# Altium PCB l1.pcbdoc
Units mm, origin at the board's own origin, x right, y up, seen from the top; angles counter-clockwise.
Board outline 142.49 x 113.03 mm, 2 copper layers (Top Layer, Bottom Layer); 17 components, 25 nets, 68 pads, 9 vias.
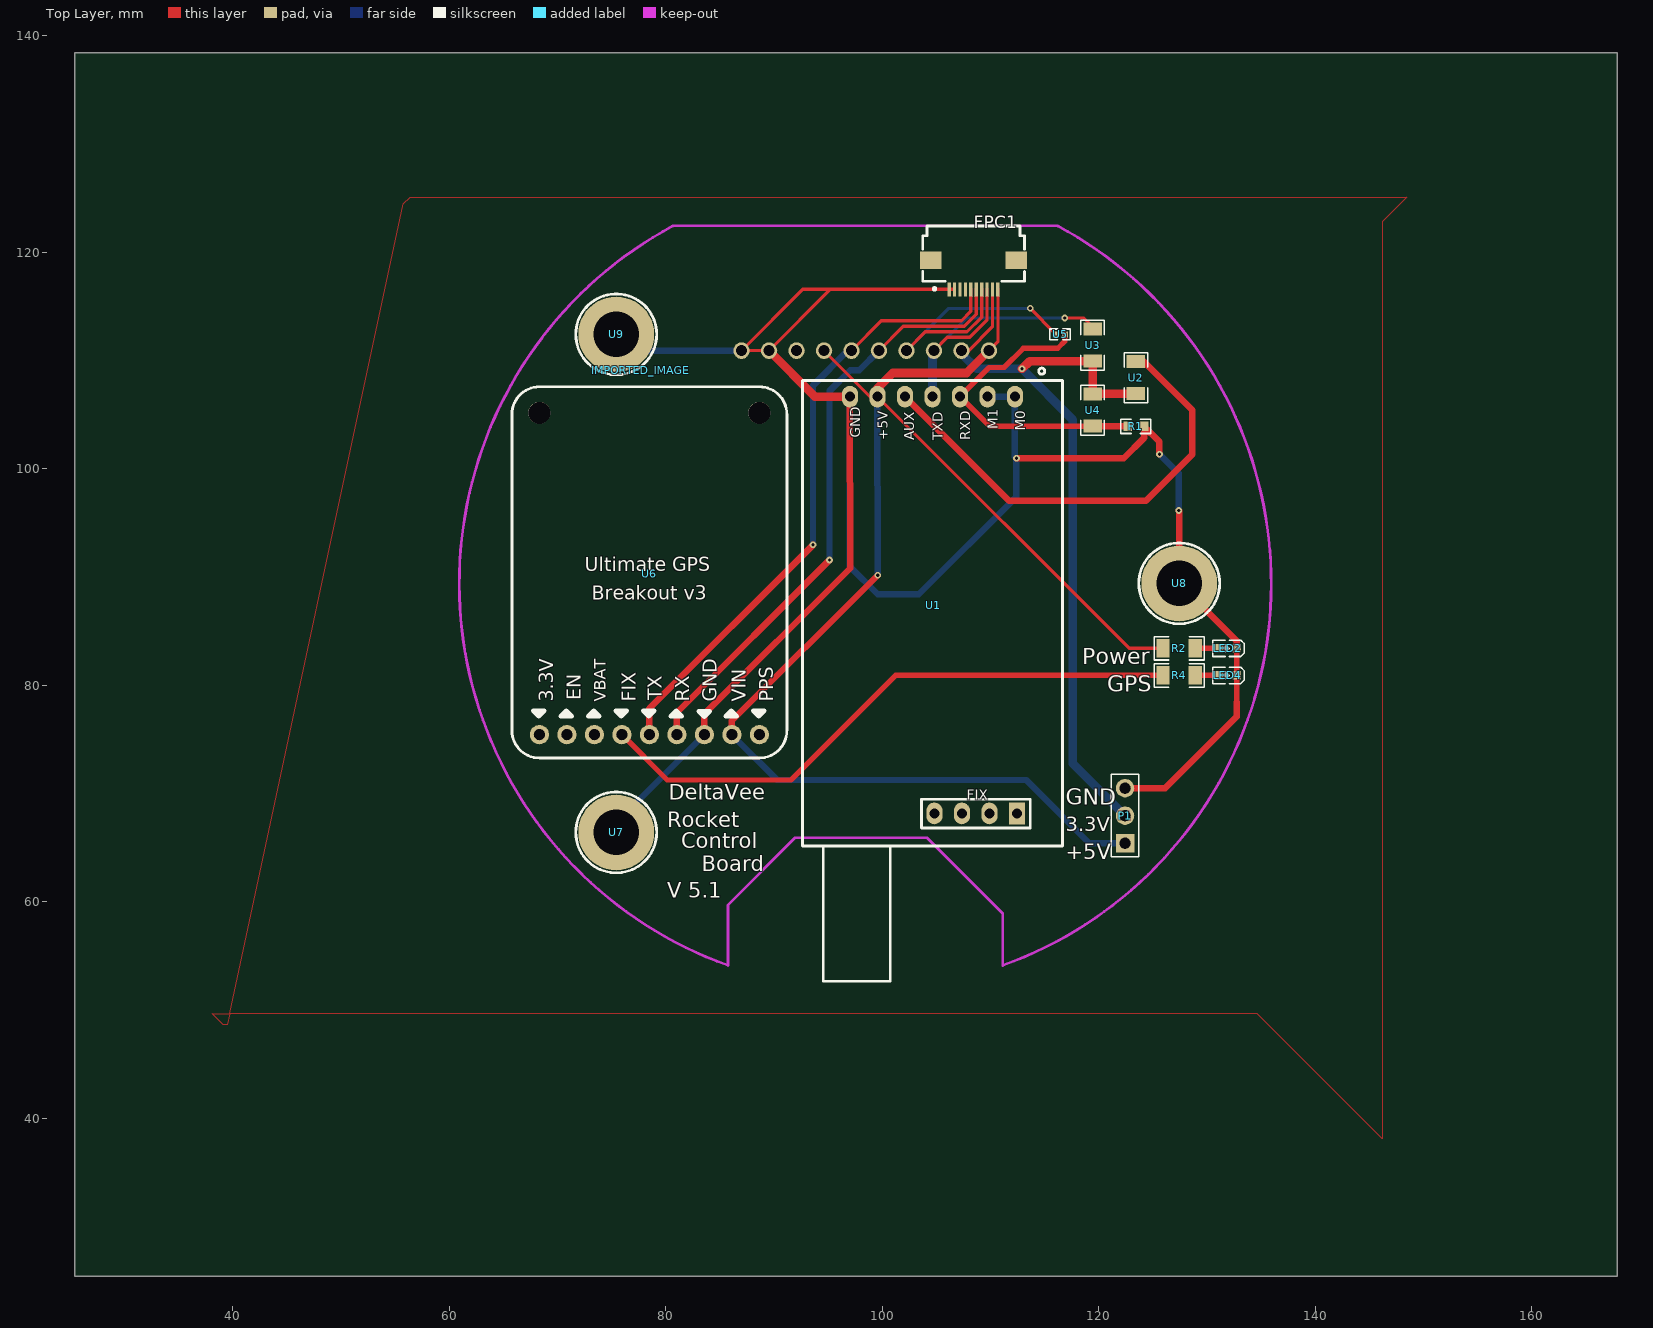
[diagram p0: Top Layer view]
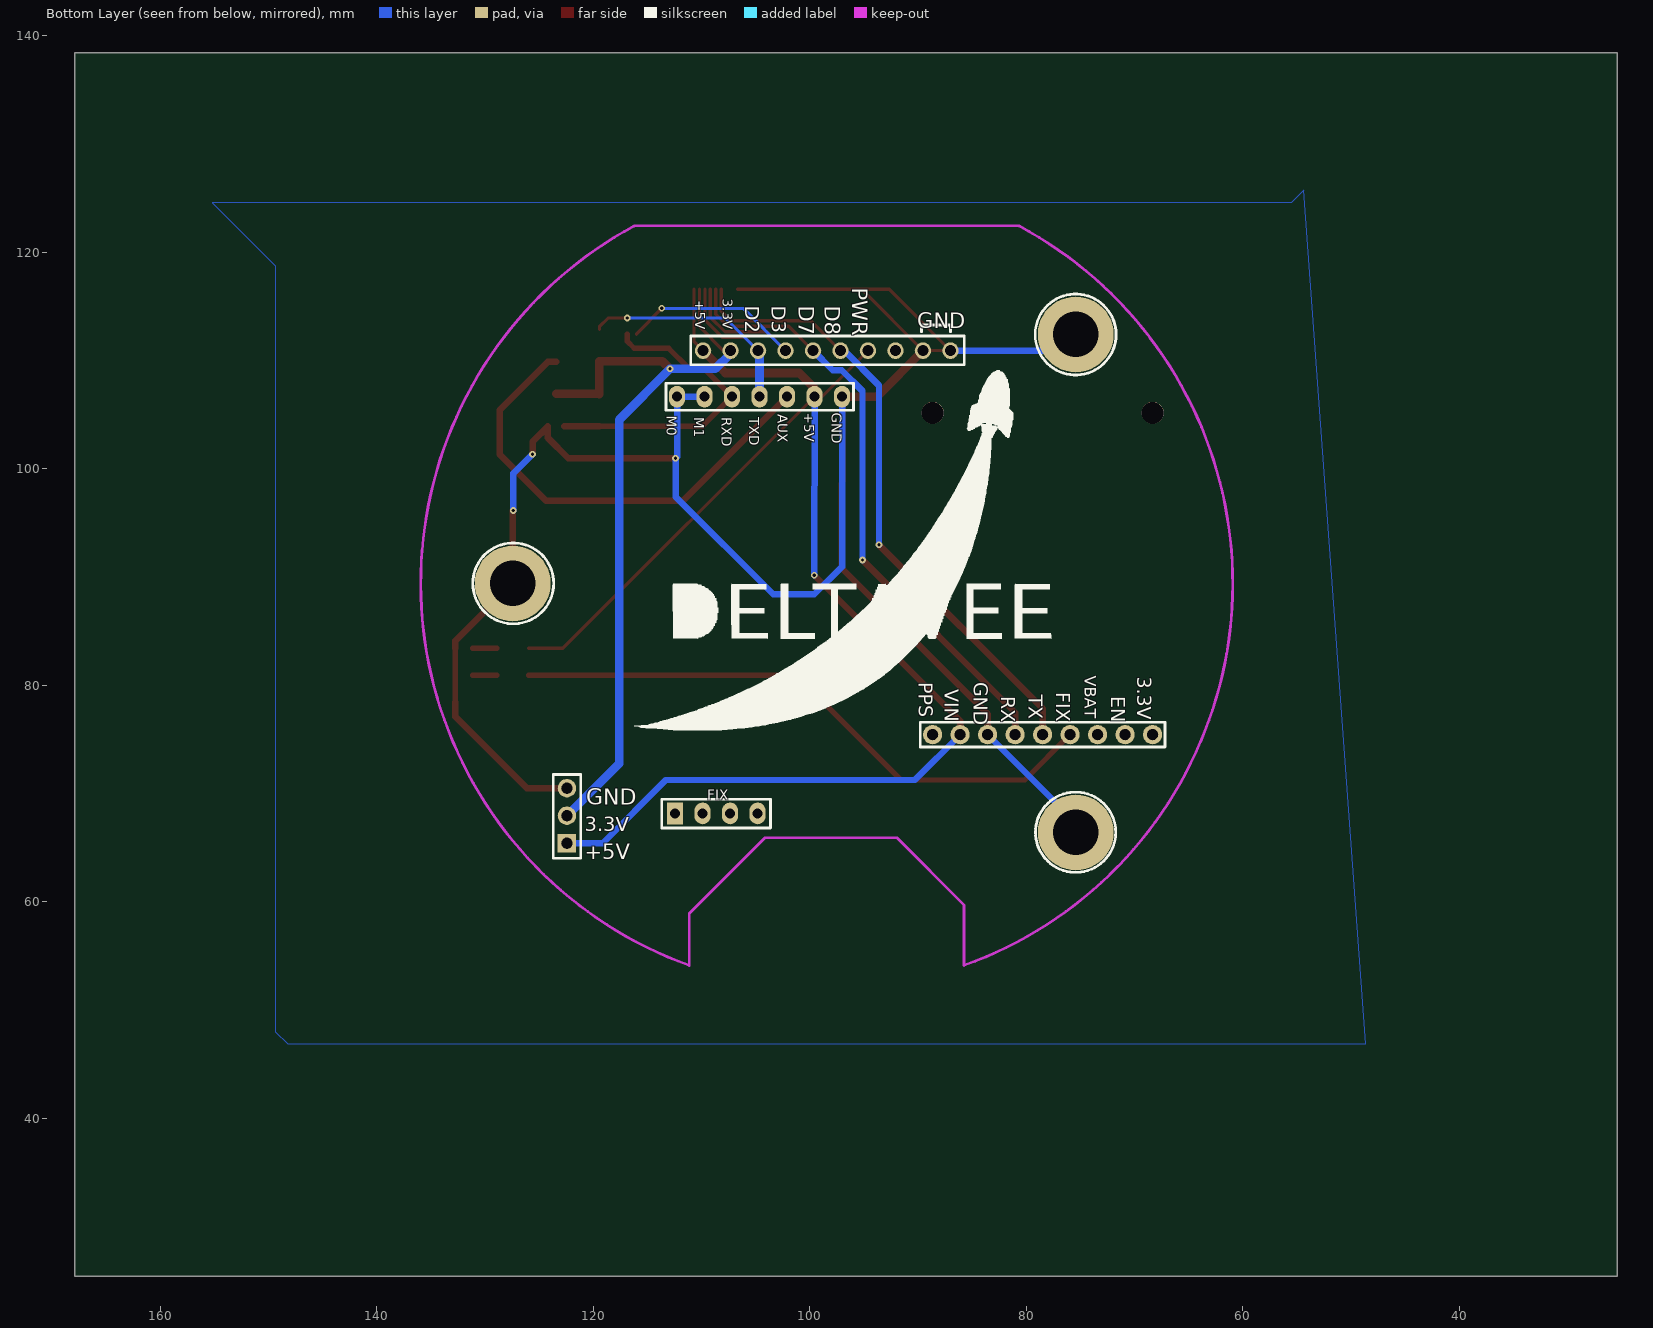
[diagram p1: Bottom Layer view, seen from below]

## Layer stack, top to bottom
Top Layer: signal copper (thickness not stored)
Dielectric: dielectric 0.32, FR-4, Dk 4.8
Bottom Layer: signal copper (thickness not stored)

## Board outline
167.894,25.4 25.4,25.4 25.4,138.43 167.894,138.43

## Components (designator, comment, footprint, x,y, rotation, side; value= is the part's Value field where it differs from the comment)
FPC1 "AFC01-S10FCA-00" FPC-SMD_P0.5-10P_FGS-XJ-H2.0 108.425,117.908 r0 top
IMPORTED_IMAGE "IMPORTED_IMAGE" IMPORTED_IMAGE 77.699,109.077 r0 top
LED2 "SMLD12E3N1WT86" LED0603-RD_GREEN 131.925,83.408 r180 top
LED4 "SMLD12E3N1WT86" LED0603-RD_GREEN 131.925,80.908 r180 top
P1 "Pin Header S-01" CONNECTOR_PINHEADER_2.54MM:PINHEADER_1X3 122.425,65.408 r180 top
R1 "2kΩ" R0603 123.425,103.908 r0 top
R2 "300Ω" R1206 127.425,83.408 r0 top
R4 "300Ω" R1206 127.425,80.908 r0 top
U1 "E22-400T30D" COMM-TH_E22-400T30D 104.725,87.408 r0 top
U2 "4.7kΩ" R1206 123.425,108.408 r270 top
U3 "4.7kΩ" R1206 119.425,111.408 r270 top
U4 "4.7kΩ" R1206 119.425,105.408 r90 top
U5 "1kΩ" R0402 116.425,112.408 r180 top
U6 "GPS_CUSTOM COPY" "ADAFRUIT GPS" 65.913,73.406 r0 top
U7 "MH_M4_S" MH_M4_PCB 75.425,66.408 r0 top
U8 "MH_M4_S" MH_M4_PCB 127.425,89.408 r0 top
U9 "MH_M4_S" MH_M4_PCB 75.425,112.408 r0 top

## Footprints (in the part's own frame and the unit in brackets; to place one, negate y for a bottom-side part, rotate by r counter-clockwise, add the part's x,y. Pads: shape width x height; smd on the part's side, far side on the other; paste and mask are expansions set on the pad)
"ADAFRUIT GPS" [mil]
  round 70 hole 39.36 paste+0 mask+2: 1(95,80) 2(195,80) 3(295,80) 4(395,80) 5(495,80) 6(595,80) 7(695,80) 8(795,80) 9(895,80)
  round 80 hole 80 unplated paste+0: ""(95,1250) ""(895,1250)
  silkscreen extent -5,-5 995,1345
COMM-TH_E22-400T30D [mm]
  oval 1.5x2 hole 0.9 paste+0 mask+0.05: 1(7.53,19.25) 2(4.99,19.25) 3(2.45,19.25) 4(-0.09,19.25) 5(-2.63,19.25) 6(-5.17,19.25) 7(-7.71,19.25) 8(0.09,-19.25) 9(2.63,-19.25) 10(5.17,-19.25)
  rect 1.5x2 hole 0.9 paste+0 mask+0.05: 11(7.71,-19.25)
  silkscreen extent -12.09,-34.75 11.91,21.88
CONNECTOR_PINHEADER_2.54MM:PINHEADER_1X3 [mm]
  rect 1.7x1.7 hole 1 slot 1.005 at 0 deg paste+0 mask+0.051: 1(0,0)
  round 1.7 hole 1 slot 1.005 at 0 deg paste+0 mask+0.051: 2(0,-2.54) 3(0,-5.08)
  silkscreen extent -1.27,-6.35 1.27,1.27
FPC-SMD_P0.5-10P_FGS-XJ-H2.0 [mm]
  rect 0.3x1.3 smd paste+0 mask+0.051: 1(-2.25,-1.338) 2(-1.75,-1.338) 3(-1.25,-1.34) 4(-0.75,-1.338) 5(-0.25,-1.34) 6(0.25,-1.338) 7(0.75,-1.338) 8(1.25,-1.338) 9(1.75,-1.338) 10(2.25,-1.34)
  rect 2x1.6 smd paste+0 mask+0.051: 11(3.95,1.34) 12(-3.95,1.34)
  silkscreen extent -4.7,-1.4 4.7,4.5
IMPORTED_IMAGE [mm]
LED0603-RD_GREEN [mm]
  rect 0.8x0.8 smd paste+0 mask+0.051: 1(-0.799,-0.003) 2(0.799,0.004)
  silkscreen extent -1.49,-0.75 1.39,0.76
MH_M4_PCB [mm]
  round 7 hole 4.2 paste+0 mask+0.051: 1(0,0)
  silkscreen extent -3.74,-3.73 3.74,3.73
R0402 [mm]
  rect 0.566x0.54 smd paste-100 mask+0.051: 1(-0.433,0) 2(0.433,0)
  silkscreen extent -0.94,-0.5 0.94,0.5
R0603 [mm]
  rect 0.806x0.864 smd paste-100 mask+0.051: 1(-0.753,0) 2(0.753,0)
  silkscreen extent -1.39,-0.66 1.39,0.66
R1206 [mm]
  rect 1.208x1.701 smd paste-100 mask+0.051: 1(-1.479,0) 2(1.479,0)
  silkscreen extent -2.31,-1.08 2.31,1.08

## Free pads (board coordinates)
  round 1.524 hole 1 paste+0 mask+0.102: 1(86.995,110.908) 2(89.535,110.908) 3(92.075,110.908) 4(94.615,110.908) 5(97.155,110.908) 6(99.695,110.908) 7(102.235,110.908) 8(104.775,110.908) 9(107.315,110.908) 10(109.855,110.908)

## Via types
v1: diameter 0.62, hole 0.31, Top Layer to Bottom Layer, tented both sides, 9 vias

## Nets (pads, with @x,y where several pads share a name; then routed paths per layer and width w, separated by ;. In a path a pad name is that pad's centre, name@x,y a point inside that pad or via, vN(x,y) a via of type N, cw(c..) or ccw(c..) an arc to the next point about the centre after c; other vN are vias at no path point)
+3V3: FPC1.9 P1.2 pad.9 U2.2 U3.2 U4.2 | length 72.8
  Top Layer w0.3: pad.9 107.988,110.909 110.175,113.096 FPC1.9
  Top Layer w0.8: v1(112.903,109.22) 113.612,109.929 U3.2 U4.2 119.467,106.929 U2.2
  Bottom Layer w0.8: pad.9 107.315,110.617 108.712,109.22 v1(112.903,109.22) 117.602,104.521 117.602,72.771 P1.2
+5V: FPC1.10 P1.1 pad.4 pad.10 R2.1 U1.6 U6.8 | length 138.5
  Top Layer w0.3: pad.4 98.864,106.657 U1.6 ; U1.6 122.805,83.408 R2.1 ; pad.10@109.855,110.908 110.675,111.728 FPC1.10
  Top Layer w0.6: U6.8 86.106,76.708 v1(99.568,90.17)
  Top Layer w0.8: U1.6 99.555,107.429 100.965,108.839 107.786,108.839 pad.10
  Bottom Layer w0.6: U6.8 90.297,71.247 113.284,71.247 119.123,65.408 P1.1 ; U1.6 v1(99.568,90.17)
D3: FPC1.7 pad.7 U5.2 | length 27.2
  Top Layer w0.3: pad.7 103.975,112.649 107.823,112.649 109.174,114 FPC1.7 ; v1(113.665,114.808) 115.992,112.481 U5.2
  Bottom Layer w0.3: pad.7@102.235,110.908 106.135,114.808 v1(113.665,114.808)
D7: FPC1.6 pad.6 U6.6 | length 56.4
  Top Layer w0.3: pad.6@99.695,110.908 101.944,113.157 107.569,113.157 108.675,114.263 FPC1.6
  Top Layer w0.6: U6.6 81.026,77.47 v1(95.123,91.567)
  Bottom Layer w0.6: v1(95.123,91.567) 95.123,107.188 97.028,109.093 97.879,109.093 pad.6
D8: FPC1.5 pad.5 U6.5 | length 58
  Top Layer w0.3: pad.5@97.155,110.908 99.912,113.665 107.315,113.665 108.175,114.525 FPC1.5
  Top Layer w0.6: U6.5 78.486,77.851 v1(93.599,92.964)
  Bottom Layer w0.6: v1(93.599,92.964) 93.599,107.696 96.812,110.909 pad.5
FPC1_11: FPC1.11
FPC1_12: FPC1.12
GND: FPC1.1 FPC1.2 LED2.1 LED4.1 P1.3 pad.1 pad.2 R1.2 U1.1 U1.2 U1.7 U6.7 U7.1 U8.1 U9.1 | length 218.9
  Top Layer w0.254: pad.1 pad.2
  Top Layer w0.3: pad.1@86.995,110.908 92.657,116.569 FPC1.1 ; pad.2@89.535,110.908 95.197,116.569 FPC1.2
  Top Layer w0.5: 132.724,78.411 LED4.1 LED2.1
  Top Layer w0.6: U6.7 83.566,77.343 97.028,90.805 U1.7 ; v1(112.395,100.965) 122.301,100.965 124.178,102.842 R1.2 ; P1.3 126.114,70.488 132.725,77.099 132.725,78.412 ; R1.2 125.603,102.483 v1(125.603,101.346) ; v1(127.381,96.139) 127.425,96.095 U8.1 132.724,84.109 LED2.1
  Top Layer w0.8: pad.2 93.785,106.658 U1.7
  Bottom Layer w0.6: U7.1 75.425,67.297 U6.7 ; U9.1 76.925,110.908 pad.1 ; U1.7 97.015,90.945 99.568,88.392 103.378,88.392 112.395,97.409 v1(112.395,100.965) 112.255,101.105 U1.1 U1.2 ; v1(125.603,101.346) 127.381,99.568 v1(127.381,96.139)
LED_FIX: R4.1 U6.4 | length 55.7
  Top Layer w0.5: U6.4 80.137,71.247 91.567,71.247 101.228,80.908 R4.1
LED_STATUS: pad.3
LORA_AUX: U1.5 U2.1 | length 43.5
  Top Layer w0.6: U1.5 111.724,97.028 124.333,97.028 128.651,101.346 128.651,105.41 124.176,109.885 U2.1
LORA_RXD: R1.1 U1.3 U4.1 U5.1 | length 29.1
  Top Layer w0.5: U5.1 116.858,111.778 116.205,111.125 113.03,111.125 111.252,109.347 109.864,109.347 U1.3 109.904,103.929 U4.1
  Top Layer w0.6: U4.1 R1.1
LORA_TXD: FPC1.8 pad.8 U1.4 U3.1 | length 29.7
  Top Layer w0.3: pad.8 106.007,112.141 108.077,112.141 109.675,113.739 FPC1.8 ; v1(116.84,113.919) 118.618,113.919 119.425,113.112 U3.1
  Bottom Layer w0.3: pad.8@104.775,110.908 107.786,113.919 v1(116.84,113.919)
  Bottom Layer w0.8: U1.4 104.635,110.768 pad.8
R2_2: LED2.2 R2.2 | length 2.2
  Top Layer w0.5: R2.2@128.905,83.409 LED2.2
R4_2: LED4.2 R4.2 | length 2.2
  Top Layer w0.5: R4.2@128.905,80.909 LED4.2
S$2248: 
S$2264: 
S$2268: 
S$2392: 
U6_1: U6.1
U6_2: U6.2
U6_3: U6.3
U6_9: U6.9
U10_3: FPC1.3
U10_4: FPC1.4
pads on no net: U1.8 U1.9 U1.10 U1.11 U6.

## Polygon pours and split planes (outlines as drawn)
GND on Top Layer (solid): 146.177,38.1 134.62,49.657 39.715,49.657 39.497,48.641 39.116,48.641 38.1,49.657 39.715,49.657 55.753,124.46 56.388,125.095 148.463,125.095 146.177,122.809 146.177,38.1
GND on Bottom Layer (solid): 54.356,125.73 55.499,124.587 155.194,124.587 149.352,118.745 149.352,48.006 148.209,46.863 48.641,46.863

## Keep-outs
Keep-Out Layer:
  lines w0.254 net S$2248: 80.639,122.421 ccw(c98.425,89.408) 85.741,54.118 ; 111.118,54.122 ccw(c98.425,89.408) 116.204,122.426

## Silkscreen, mask and mechanical layers (free items; w line width, h text height)
Top Overlay:
  lines w0.254: 103.632,66.802 113.665,66.802 113.665,69.469 103.632,69.469 103.632,66.802
  text "M1" at 110.686,103.632 h0.9 r90
  text "M0" at 113.226,103.505 h0.9 r90
  text "GND" at 97.986,102.87 h0.9 r90
  text "+5V" at 100.526,102.616 h0.9 r90
  text "AUX" at 102.939,102.616 h0.9 r90
  text "TXD" at 105.606,102.616 h0.9 r90
  text "RXD" at 108.146,102.616 h0.9 r90
  text "Power" at 118.491,81.927 h1.5
  text "GPS" at 120.777,79.387 h1.5
  text "DeltaVee" at 80.264,69.404 h1.4
  text "FIX" at 107.823,69.4 h0.9
  text "GND" at 116.967,68.973 h1.5
  text "Rocket" at 80.137,66.864 h1.4
  text "3.3V" at 116.967,66.533 h1.3
  text "Control" at 81.407,64.959 h1.4
  text "+5V" at 116.967,63.943 h1.4
  text "Board" at 83.312,62.8 h1.4
  text "V 5.1" at 80.137,60.387 h1.4
Bottom Overlay:
  circle w0.254: c75.438,112.395 r3.735
  circle w0.254: c127.381,89.408 r3.735
  circle w0.254: c75.438,66.421 r3.709
  lines w0.254: 67.183,74.295 89.789,74.295 89.789,76.581 67.183,76.581 67.183,74.295 ; 85.725,109.601 110.998,109.601 110.998,112.268 85.725,112.268 85.725,109.601 ; 95.948,105.41 113.284,105.41 113.284,107.886 95.948,107.886 95.948,105.41 ; 103.632,66.802 113.665,66.802 113.665,69.469 103.632,69.469 103.632,66.802 ; 121.158,64.008 123.698,64.008 123.698,71.755 121.158,71.755 121.158,64.008
  lines w0.254 net S$2392: 86.995,112.649 86.995,113.284 89.662,113.284 89.662,112.649
  text "PWR" at 96.077,116.713 h1.4 r90
  text "3.3V" at 108.019,115.697 h0.9 r90
  text "+5V" at 110.559,115.57 h0.9 r90
  text "D8" at 98.617,115.062 h1.4 r90
  text "D7" at 101.03,115.062 h1.4 r90
  text "D3" at 103.52,115.062 h1.3 r90
  text "D2" at 105.933,115.062 h1.3 r90
  text "GND" at 90.043,112.965 h1.4
  text "GND" at 97.986,105.156 h0.9 r90
  text "+5V" at 100.526,105.156 h0.9 r90
  text "AUX" at 102.939,105.029 h0.9 r90
  text "M0" at 113.226,104.902 h0.9 r90
  text "TXD" at 105.606,104.775 h0.9 r90
  text "RXD" at 108.146,104.775 h0.9 r90
  text "M1" at 110.686,104.775 h0.9 r90
  text "VBAT" at 74.574,80.899 h1.07 r90
  text "3.3V" at 69.723,80.772 h1.27 r90
  text "GND" at 84.836,80.264 h1.27 r90
  text "PPS" at 89.916,80.264 h1.27 r90
  text "VIN" at 87.503,79.629 h1.27 r90
  text "FIX" at 77.216,79.375 h1.27 r90
  text "TX" at 79.756,79.121 h1.27 r90
  text "EN" at 72.136,78.994 h1.27 r90
  text "RX" at 82.296,78.994 h1.27 r90
  text "FIX" at 109.474,69.4 h0.9
  text "GND" at 120.65,68.973 h1.5
  text "3.3V" at 120.777,66.533 h1.3
  text "+5V" at 120.777,63.943 h1.4

## Text inside footprints (layer, text, board x,y; h text height)
U6: Top Overlay "3.3V" at 69.596,78.486 h1.27 r90; Top Overlay "EN" at 72.136,78.613 h1.27 r90; Top Overlay "VBAT" at 74.447,78.486 h1.07 r90; Top Overlay "FIX" at 77.216,78.486 h1.27 r90; Top Overlay "TX" at 79.629,78.613 h1.27 r90; Top Overlay "RX" at 82.169,78.486 h1.27 r90; Top Overlay "GND" at 84.709,78.486 h1.27 r90; Top Overlay "PPS" at 89.916,78.486 h1.27 r90; Top Overlay "VIN" at 87.376,78.486 h1.27 r90; Top Overlay "Breakout v3" at 73.152,87.884 h1.27; Top Overlay "Ultimate GPS" at 72.517,90.551 h1.27